# EAGLE board Anter (EAGLE 9.6.2)
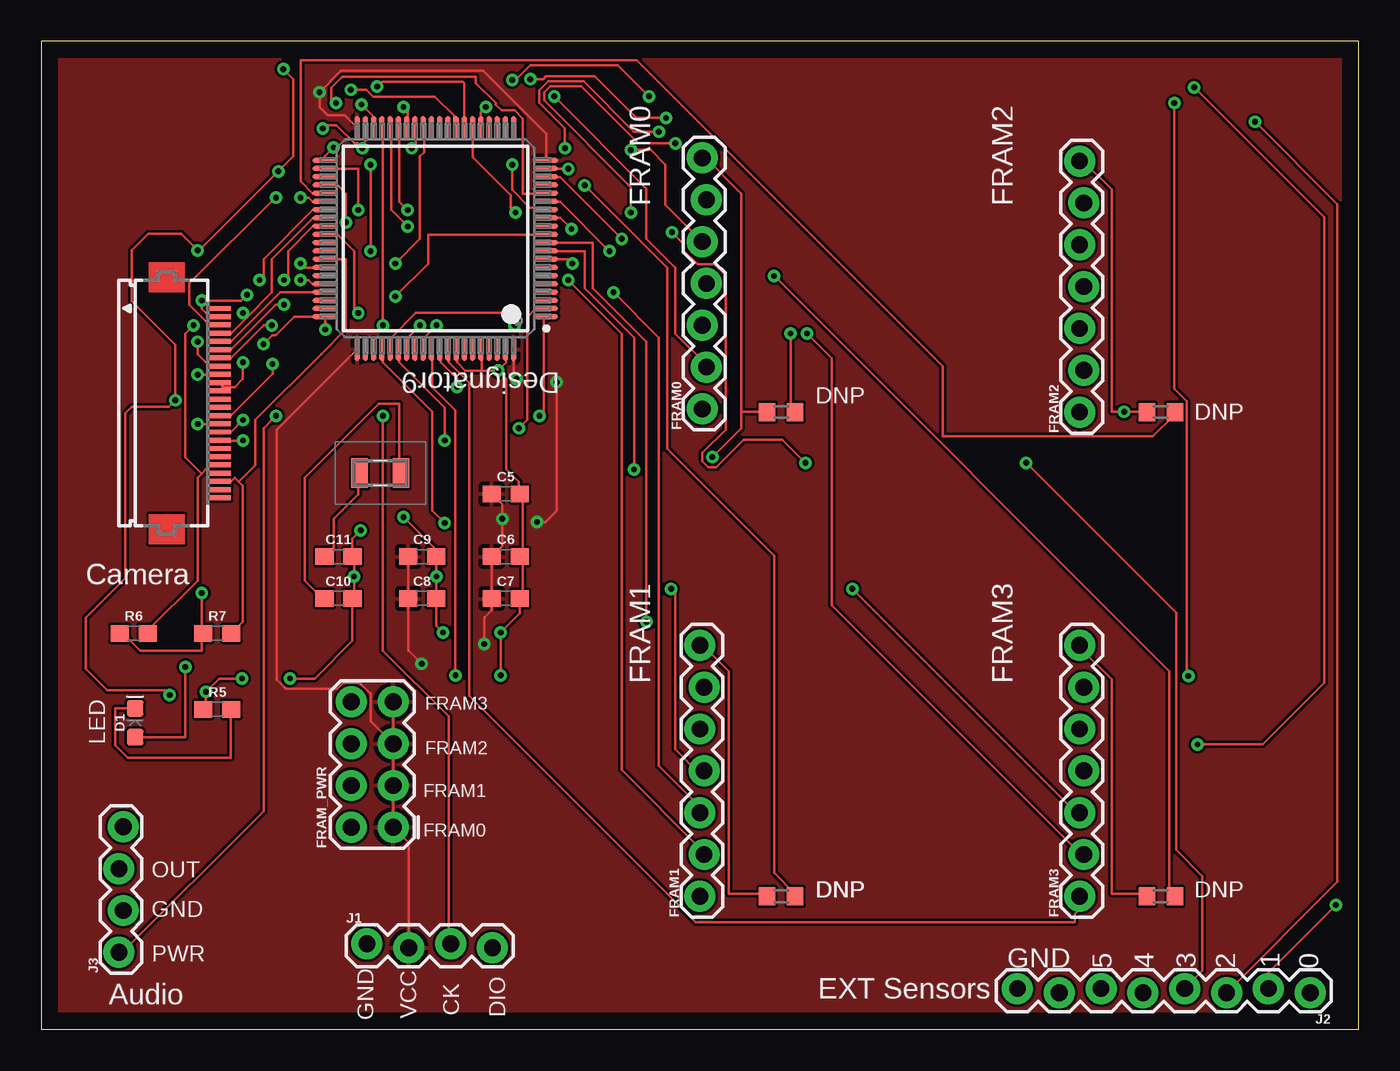
[diagram p0: board, top side]
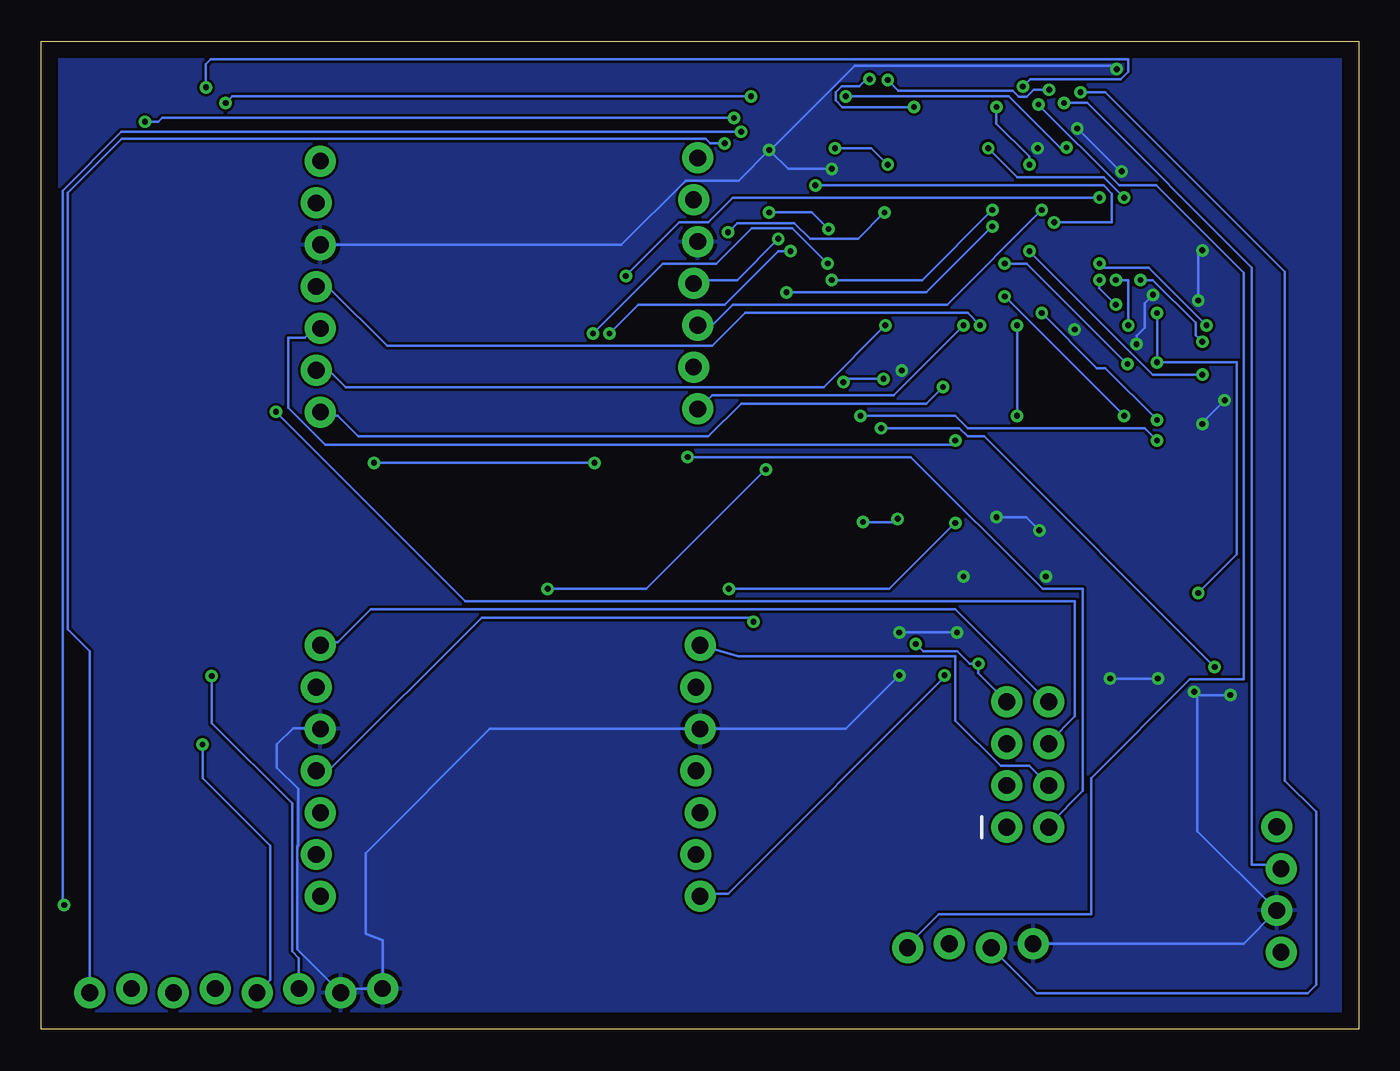
[diagram p1: board, bottom side, seen from below]

Size 80 x 60 mm. Coordinates in mm from the lower left corner, seen from the top.
Outline: 0,0 80,0 80,60 0,60 0,0
Copper layers (1*16): Top 0.035mm / dielectric 1.5mm / Bottom 0.035mm
Design rules "default": minimum track width 6mil, minimum drill 0.35mm, track to track 6mil, track to pad 6mil, pad to pad 6mil, via to via 6mil, smd to smd 6mil, copper to edge 40mil, drill to drill 6mil, minimum pad ring 10mil, minimum via ring 8mil, stop-mask expansion 4mil, vias tented up to drill 0mil, thermal gap 10mil

## Footprints (pad centres in the part's own frame; a part is rotated, then mirrored left to right if it is on the bottom)
0603 = smd 1.1 x 1: 1 -0.85,0; 2 0.85,0
LED-0603 = smd 1 x 1: A -0.877,0; C 0.877,0
1X07_LOCK = drill 1.016 pad 1.88: 1 0,0.127; 2 2.54,-0.127; 3 5.08,0.127; 4 7.62,-0.127; 5 10.16,0.127; 6 12.7,-0.127; 7 15.24,0.127
2X4 = drill 1.016 pad 1.88: 1 -3.81,-1.27; 2 -3.81,1.27; 3 -1.27,-1.27; 4 -1.27,1.27; 5 1.27,-1.27; 6 1.27,1.27; 7 3.81,-1.27; 8 3.81,1.27
1X04_LOCK = drill 1.016 pad 1.88: 1 0,0.127; 2 2.54,-0.127; 3 5.08,0.127; 4 7.62,-0.127
1X08_LOCK = drill 1.016 pad 1.88: 1 0,0.127; 2 2.54,-0.127; 3 5.08,0.127; 4 7.62,-0.127; 5 10.16,0.127; 6 12.7,-0.127; 7 15.24,0.127; 8 17.78,-0.127
R0603 = smd 1 x 1.1: 1 -0.85,0; 2 0.85,0
PN0080A_N = smd 1.45 x 0.3: 1 -6.725,4.75; 2 -6.725,4.25; 3 -6.725,3.75; 4 -6.725,3.25; 5 -6.725,2.75; 6 -6.725,2.25; 7 -6.725,1.75; 8 -6.725,1.25; 9 -6.725,0.75; 10 -6.725,0.25; 11 -6.725,-0.25; 12 -6.725,-0.75; 13 -6.725,-1.25; 14 -6.725,-1.75; 15 -6.725,-2.25; 16 -6.725,-2.75; 17 -6.725,-3.25; 18 -6.725,-3.75; 19 -6.725,-4.25; 20 -6.725,-4.75; 41 6.725,-4.75; 42 6.725,-4.25; 43 6.725,-3.75; 44 6.725,-3.25; 45 6.725,-2.75; 46 6.725,-2.25; 47 6.725,-1.75; 48 6.725,-1.25; 49 6.725,-0.75; 50 6.725,-0.25; 51 6.725,0.25; 52 6.725,0.75; 53 6.725,1.25; 54 6.725,1.75; 55 6.725,2.25; 56 6.725,2.75; 57 6.725,3.25; 58 6.725,3.75; 59 6.725,4.25; 60 6.725,4.75 | smd 0.3 x 1.45: 21 -4.75,-6.725; 22 -4.25,-6.725; 23 -3.75,-6.725; 24 -3.25,-6.725; 25 -2.75,-6.725; 26 -2.25,-6.725; 27 -1.75,-6.725; 28 -1.25,-6.725; 29 -0.75,-6.725; 30 -0.25,-6.725; 31 0.25,-6.725; 32 0.75,-6.725; 33 1.25,-6.725; 34 1.75,-6.725; 35 2.25,-6.725; 36 2.75,-6.725; 37 3.25,-6.725; 38 3.75,-6.725; 39 4.25,-6.725; 40 4.75,-6.725; 61 4.75,6.725; 62 4.25,6.725; 63 3.75,6.725; 64 3.25,6.725; 65 2.75,6.725; 66 2.25,6.725; 67 1.75,6.725; 68 1.25,6.725; 69 0.75,6.725; 70 0.25,6.725; 71 -0.25,6.725; 72 -0.75,6.725; 73 -1.25,6.725; 74 -1.75,6.725; 75 -2.25,6.725; 76 -2.75,6.725; 77 -3.25,6.725; 78 -3.75,6.725; 79 -4.25,6.725; 80 -4.75,6.725
FH12-24S-0.5SH = smd 0.3 x 1.3: 1 -5.75,3.25; 2 -5.25,3.25; 3 -4.75,3.25; 4 -4.25,3.25; 5 -3.75,3.25; 6 -3.25,3.25; 7 -2.75,3.25; 8 -2.25,3.25; 9 -1.75,3.25; 10 -1.25,3.25; 11 -0.75,3.25; 12 -0.25,3.25; 13 0.25,3.25; 14 0.75,3.25; 15 1.25,3.25; 16 1.75,3.25; 17 2.25,3.25; 18 2.75,3.25; 19 3.25,3.25; 20 3.75,3.25; 21 4.25,3.25; 22 4.75,3.25; 23 5.25,3.25; 24 5.75,3.25
FC135327680KAAG0 = smd 1 x 1.8: 1 -1.25,0; 2 1.25,0

## Placement (x,y rotation side)
C5  0.1uF  [0603]  28.21,32.51 0 top
C6  0.1uF  [0603]  28.21,28.7 0 top
C7  0.1uF  [0603]  28.21,26.16 0 top
C8  0.1uF  [0603]  23.13,26.16 0 top
C9  10uF  [0603]  23.13,28.7 0 top
C10  22pF  [0603]  18.05,26.16 0 top
C11  22pF  [0603]  18.05,28.7 0 top
D1  RED  [LED-0603]  5.7,18.62 90 top
FRAM0  [1X07_LOCK]  40.26,37.67 90 top
FRAM1  [1X07_LOCK]  40.12,8.08 90 top
FRAM2  [1X07_LOCK]  63.17,37.48 90 top
FRAM3  [1X07_LOCK]  63.17,8.08 90 top
FRAM_PWR  [2X4]  20.1,16.08 90 top
J1  [1X04_LOCK]  19.78,5.08 0 top
J2  [1X08_LOCK]  77.05,2.35 180 top
J3  [1X04_LOCK]  4.85,4.68 90 top
R0  [R0603]  44.93,37.48 0 top
R1  [R0603]  44.93,8.08 0 top
R2  [R0603]  67.98,37.48 0 top
R3  [R0603]  67.98,8.08 0 top
R5  470  [0603]  10.7,19.43 0 top
R6  4.7k  [0603]  5.62,24.05 0 top
R7  4.7k  [0603]  10.7,24.05 0 top
U0  MSP430FR5994PN  [PN0080A_N]  23.94,48.02 180 top
X1  CAM_24Pin  [FH12-24S-0.5SH]  7.62,38.02 270 top
Y1  FC-135R  [FC135327680KAAG0]  20.59,33.78 0 top

## Library data of the parts
C5-C8 = SparkFun-Capacitors; PROD_ID: CAP-08604
C9 = SparkFun-Capacitors; PROD_ID: CAP-11015
C10 C11 = SparkFun-Capacitors; PROD_ID: CAP-07876
D1 = SparkFun-LED; PROD_ID: DIO-00819
FRAM0 FRAM1-FRAM3 FRAM_PWR J2 = SparkFun-Connectors
J1 J3 = SparkFun-Connectors; PROD_ID: CONN-09696
R0 R1-R3 = rcl; SPICEPREFIX: R
R5 = SparkFun-Resistors; PROD_ID: RES-07869
R6 R7 = SparkFun-Resistors; PROD_ID: RES-07857
U0 = MSP430FR5994_MCU_80pin; MANUFACTURER: Texas Instruments; PARTNUMBER: MSP430FR5994IPNR; REFDES: RefDes; TYPE: TYPE
X1 = con-hirose; MPN: FH12-24S-0.5SH(55); OC_FARNELL: 1324552; OC_NEWARK: 34M6170
Y1 = FC-135R; ARROW_PART_NUMBER: FC-135R; DESCRIPTION: https://www.mouser.com/ds/2/137/1699449-465441.pdf; HEIGHT: mm; MANUFACTURER_NAME: SEIKO INSTRUMENTS; MANUFACTURER_PART_NUMBER: FC-135R

## Nets
CAM_D0: U0.32 X1.14
CAM_D1: U0.33 X1.3
CAM_D2: U0.34 X1.9
CAM_D3: U0.57 X1.5
CAM_FVLD: U0.56 X1.6
CAM_LVLD: U0.50 X1.16
CAM_MCLK: U0.47 X1.8
CAM_PCLK: U0.1 X1.17
CAM_PWR: R6.1 R7.1 U0.48 X1.4 X1.10 X1.11
CAM_SCL: R6.2 U0.54 X1.21
CAM_SDA: R7.2 U0.53 X1.22
CAM_TRIG: U0.49 X1.7
EXT0: J2.1 U0.13
EXT1: J2.2 U0.14
EXT2: J2.3 U0.25
EXT3: J2.4 U0.26
EXT4: J2.5 U0.27
EXT5: J2.6 U0.28
FRAM0_CS: FRAM0.1 U0.69
FRAM0_PWR: FRAM0.7 FRAM_PWR.2 R0.1
FRAM0_PWR_CTR: R0.2 U0.15
FRAM1_CS: FRAM1.1 U0.70
FRAM1_PWR: FRAM1.7 FRAM_PWR.4 R1.1
FRAM1_PWR_CTR: R1.2 U0.44
FRAM2_CS: FRAM2.1 U0.71
FRAM2_PWR: FRAM2.7 FRAM_PWR.6 R2.1
FRAM2_PWR_CTR: R2.2 U0.45
FRAM3_CS: FRAM3.1 U0.72
FRAM3_PWR: FRAM3.7 FRAM_PWR.8 R3.1
FRAM3_PWR_CTR: R3.2 U0.46
GND: C5.2 C6.2 C7.2 C8.2 C9.2 C10.2 C11.2 FRAM0.5 FRAM1.5 FRAM2.5 FRAM3.5 J1.1 J2.7 J2.8 J3.2 R5.1 U0.19 U0.39 U0.60 U0.73 U0.76 U0.79 X1.2 X1.15
LED: D1.A U0.2
MIC_OUT: J3.3 U0.16
MIC_PWR: J3.1 U0.11
N$1: C10.1 Y1.2
N$2: C11.1 Y1.1
N$11: D1.C R5.2
SBWTCK: J1.3 U0.37
SBWTDIO: J1.4 U0.38
UCA0_CLK: FRAM0.4 U0.18
UCA0_SIMO: FRAM0.2 U0.41
UCA0_SOMI: FRAM0.3 U0.42
UCA1_CLK: FRAM1.4 U0.64
UCA1_SIMO: FRAM1.2 U0.35
UCA1_SOMI: FRAM1.3 U0.36
UCA2_CLK: FRAM2.4 U0.67
UCA2_SIMO: FRAM2.2 U0.65
UCA2_SOMI: FRAM2.3 U0.66
UCA3_CLK: FRAM3.4 U0.10
UCA3_SIMO: FRAM3.2 U0.8
UCA3_SOMI: FRAM3.3 U0.9
VCC: C5.1 C6.1 C7.1 C8.1 C9.1 FRAM_PWR.1 FRAM_PWR.3 FRAM_PWR.5 FRAM_PWR.7 J1.2 U0.20 U0.40 U0.61 U0.80

## Tracks (layer width: path | path; a pad name or v marks a point on that pad's centre or on a via)
CAM_D0  (via drill 0.35)
  Top 0.152: v14.05,40.4 14.05,39.8 11.5,37.25 11,37.25 X1.14 | v21.5,46.5 23,48 23,53 23.25,53.25 23.25,54.5 U0.32
  Bottom 0.152: v14.05,40.4 20.15,46.5 v21.5,46.5
CAM_D1  (via drill 0.35)
  Top 0.152: v14.25,50.5 14.2,50.5 9,45.3 9,44 10.25,42.75 10.75,42.75 X1.3 | v22.5,53.5 22.75,53.75 22.75,54.5 U0.33
  Bottom 0.152: v14.25,50.5 15.5,51.75 20.75,51.75 v22.5,53.5
CAM_D2  (via drill 0.35)
  Top 0.152: v9.5,39.75 10.75,39.75 X1.9 | v20,52.5 v20,47.25 | v22,56 22.25,55.75 22.25,54.75 U0.34
  Bottom 0.152: v9.5,39.75 12.5,39.75 v20,47.25 | v20,52.5 20,53 22,55 v22,56
CAM_D3
  Top 0.152: X1.5 11,41.75 11.5,41.75 14.5,44.75 17,44.75 U0.57
CAM_FVLD  (via drill 0.35)
  Top 0.152: v14.75,44 14.25,44 11.5,41.25 11,41.25 X1.6 | v15.75,45.5 16.25,45.5 16.5,45.25 17,45.25 U0.56
  Bottom 0.152: v14.75,44 15.75,45 v15.75,45.5
CAM_LVLD  (via drill 0.35)
  Top 0.152: v12.25,37 11.5,36.25 11,36.25 X1.16 | v19.25,43.5 19,43.75 19,47.25 18,48.25 17.25,48.25 U0.50
  Bottom 0.152: v12.25,37 15.4,40.15 15.9,40.15 v19.25,43.5
CAM_MCLK  (via drill 0.35)
  Top 0.152: v9.5,41.75 9.5,41 10.25,40.25 10.75,40.25 X1.8 | v13.25,45.5 13.5,45.75 13.5,46.75 16.5,49.75 17,49.75 U0.47
  Bottom 0.152: v9.5,41.75 9.9,42.15 9.9,42.9 12.5,45.5 v13.25,45.5
CAM_PCLK  (via drill 0.35)
  Top 0.152: v12.25,35.75 11,35.75 X1.17 | v30.25,37.25 30.5,37.5 30.5,43.25 U0.1
  Bottom 0.152: v12.25,35.75 13,36.5 23.75,36.5 24.5,37.25 v30.25,37.25
CAM_PWR  (via drill 0.35)
  Top 0.152: R6.1 5,24 6,23 9.75,23 9.75,24 R7.1 9.75,24.25 v9.75,26.5 | 11,39 11,39.25 X1.10 | 11,39 11,38.75 X1.11 | 12.5,43.25 14,44.75 14,46.75 16.5,49.25 17,49.25 U0.48 | 12.5,43.25 11.5,42.25 11,42.25 X1.4 | 11,39 11.75,39 12.25,39.5 v12.25,40.5 | 12.5,43.25 v12.25,43.5
  Bottom 0.152: v12.25,43.5 v12.25,40.5 7.4,40.5 7.4,28.85 v9.75,26.5
CAM_SCL  (via drill 0.35)
  Top 0.152: 9.75,33.75 10,34 10.25,33.75 10.75,33.75 X1.21 | 9.75,33.75 9.5,33.5 9.5,27.25 6.5,24.25 R6.2 | v15.75,46.5 15.75,46.25 17,46.25 U0.54 | v9.25,42.75 8.75,42.25 8.75,34.75 9.75,33.75
  Bottom 0.152: v15.75,46.5 15.5,46.25 12.75,46.25 v9.25,42.75
CAM_SDA
  Top 0.152: R7.2 12.25,24.75 12.25,33 12,33.25 | 12,33.25 11.75,33.5 11.5,33.25 11,33.25 X1.22 | 12,33.25 13,34.25 13,37 17,41 18.5,42.5 18.5,46.75 17.25,46.75 U0.53
CAM_TRIG  (via drill 0.35)
  Top 0.152: v14,42.75 13.5,42.75 11.5,40.75 11,40.75 X1.7 | v14.75,45.5 15,45.75 15,47.25 16.5,48.75 17,48.75 U0.49
  Bottom 0.152: v14,42.75 14,45.5 v14.75,45.5
EXT0  (via drill 0.35)
  Top 0.152: U0.13 31.53,49.27 v32.2,48.6 | v35.8,49.6 35.8,51.14 30.54,56.4 30.54,56.9 30.9,57.26 32.8,57.26 36.26,53.8 v38.5,53.8
  Bottom 0.152: v32.2,48.6 33.2,49.6 v35.8,49.6 | v38.5,53.8 39.37,53.8 39.65,54.08 75.12,54.08 78.4,50.8 78.4,24.3 77.05,22.95 J2.1
EXT1  (via drill 0.35)
  Top 0.152: U0.14 30.54,49.89 29.68,49.89 28.6,50.97 v28.6,52.5 | v37.5,54.5 35.99,54.5 32.93,57.56 30.77,57.56 30.24,57.03 30.24,56.27 31.8,54.71 v31.8,53.5 | v78.61,7.55 74.51,3.45 J2.2
  Bottom 0.152: v28.6,52.5 29.6,53.5 v31.8,53.5 | v37.5,54.5 75.13,54.5 78.7,50.93 78.7,24.17 78.7,7.64 v78.61,7.55
EXT2  (via drill 0.35)
  Top 0.152: U0.25 26.69,55.69 v27,56 | v29.7,57.69 30.47,57.69 30.65,57.87 33.62,57.87 36.14,55.34 v37.94,55.34 | v73.7,55.11 78.7,50.11 78.7,8.95 J2.3
  Bottom 0.152: v27,56 31.36,56 31.76,56.4 31.76,56.9 31.4,57.26 30.34,57.26 29.91,57.69 v29.7,57.69 | v37.94,55.34 72.66,55.34 72.9,55.1 v73.69,55.1 v73.7,55.11
EXT3  (via drill 0.35)
  Top 0.152: v28.8,49.6 28.5,49.9 28.5,50.64 26.19,52.95 U0.26 | v38.3,48.4 38.97,47.73 38.97,47.35 39.85,46.46 40.87,46.46 41.55,45.77 41.55,36.41 40.14,35 40.14,34.5 40.5,34.14 41,34.14 42.66,35.8 45,35.8 v46.4,34.4 | v59.8,34.4 68.9,25.3 68.9,10.9 70.5,9.3 70.5,3.55 J2.4
  Bottom 0.152: v46.4,34.4 v59.8,34.4 | v28.8,49.6 30.41,47.99 33.31,47.99 34.27,48.95 37.74,48.95 v38.3,48.4
EXT4  (via drill 0.35)
  Top 0.152: U0.27 25.69,57.45 25.6,57.55 20.7,57.55 v20.4,57.24 | v70,57.2 77.9,49.3 77.9,21.04 74.17,17.3 v70.2,17.3
  Bottom 0.152: v20.4,57.24 19.95,57.69 14.45,57.69 14,58.14 14,58.91 69.7,58.91 70,58.61 v70,57.2 | v70.2,17.3 70.2,15.25 66.1,11.15 66.1,3.01 J2.5
EXT5  (via drill 0.35)
  Top 0.152: U0.28 25.07,54.87 25.07,55.48 23.91,56.64 20.15,56.64 19.73,57.05 v18.8,57.05 | v28.6,57.65 28.8,57.65 29.69,58.55 35.01,58.55 v36.9,56.65 | v68.8,56.25 68.8,38.88 69.56,38.12 69.56,21.54 v69.65,21.45
  Bottom 0.152: v18.8,57.05 19.73,57.05 20.15,56.64 20.65,56.64 21.02,57 27.95,57 v28.6,57.65 | v36.9,56.65 68.4,56.65 v68.8,56.25 | v69.65,21.45 69.65,18.6 64.77,13.72 64.77,4.74 64.35,4.32 J2.6
FRAM0_CS  (via drill 0.35)
  Top 0.152: v24,42.75 23.25,42 23.25,41.5 U0.69
  Bottom 0.152: v24,42.75 28.25,38.5 39.25,38.5 40,37.75 FRAM0.1
FRAM0_PWR  (via drill 0.35)
  Top 0.152: 42.5,37.5 44,37.5 R0.1 | 42.5,37.5 42.5,50.75 40.25,53 FRAM0.7 | v40.75,34.75 42.5,36.5 42.5,37.5
  Bottom 0.152: v40.75,34.75 27.2,34.75 19.2,26.75 16.75,26.75 16.75,14.5 18.75,12.5 FRAM_PWR.2
FRAM0_PWR_CTR  (via drill 0.35)
  Top 0.152: v45.5,42.25 45.5,37.75 45.75,37.5 R0.2 | v34.5,47.25 31.5,50.25 30.75,50.25 U0.15
  Bottom 0.152: v45.5,42.25 43.75,44 38.5,44 35.25,47.25 v34.5,47.25
FRAM1_CS  (via drill 0.35)
  Top 0.152: v25.15,21.5 25.15,37.6 23.75,39 23.75,41.25 U0.70
  Bottom 0.152: v25.15,21.5 25.15,21.4 38.3,8.25 39.75,8.25 FRAM1.1
FRAM1_PWR
  Top 0.152: R1.1 44,8.25 41.75,8.25 41.75,21.75 40,23.5 FRAM1.7
  Bottom 0.152: FRAM_PWR.4 19,15 20,16 21.75,16 24.5,18.75 24.5,22.65 37.67,22.65 FRAM1.7
FRAM1_PWR_CTR  (via drill 0.35)
  Top 0.152: v33,51.25 38,46.25 38,35.25 44.5,28.75 44.5,9.5 45.75,8.25 R1.2 | v18.5,49 18.5,50.75 18,51.25 17.25,51.25 U0.44
  Bottom 0.152: v33,51.25 15.5,51.25 15,50.75 15,49 v18.5,49
FRAM2_CS  (via drill 0.35)
  Top 0.152: v25.25,39 25.25,39.5 24.25,40.5 24.25,41.25 U0.71
  Bottom 0.152: v25.25,39 26.25,38 37.5,38 39.5,36 60.75,36 62,37.25 63,37.25 FRAM2.1
FRAM2_PWR  (via drill 0.35)
  Top 0.152: R2.1 67,37.5 v65.75,37.5 65,37.5 65,51 63.25,52.75 FRAM2.7
  Bottom 0.152: v65.75,37.5 54.25,26 17.25,26 17.25,19 18.75,17.5 FRAM_PWR.6
FRAM2_PWR_CTR
  Top 0.152: R2.2 68.75,37.25 67.5,36 54.75,36 54.75,40.25 36.15,58.85 15.75,58.85 15.75,51.5 16.5,50.75 17,50.75 U0.45
FRAM3_CS
  Top 0.152: U0.72 24.75,41.25 24.75,40.5 26,39.25 26,20.25 39.75,6.5 62.75,6.5 62.75,7 63,7.25 63,8 FRAM3.1
FRAM3_PWR
  Top 0.152: R3.1 67,8.25 65,8.25 65,21.25 63.25,23 63.25,23.25 FRAM3.7
  Bottom 0.152: FRAM_PWR.8 19,20 24.5,25.5 60,25.5 62,23.5 63,23.5 FRAM3.7
FRAM3_PWR_CTR  (via drill 0.35)
  Top 0.152: v44.5,45.75 68.5,21.75 68.5,8.5 68.75,8.25 R3.2 | v15.75,50.5 16.25,50.5 16.5,50.25 17,50.25 U0.46
  Bottom 0.152: v44.5,45.75 41.25,49 39.5,49 38,50.5 v15.75,50.5
GND  (via drill 0.35)
  Top 0.152: 26.75,40 25.75,40 25.25,40.5 25.25,41.25 U0.73 | 26.75,40 26.75,41.25 U0.76 | v27.75,40 28.25,40.5 28.25,41.25 U0.79 | 26.75,40 v27.75,40 | v27.75,40 28.25,39.5 28.25,34 29,33.25 29,32.75 C5.2 29.25,32.5 29.25,28.75 C6.2 29.25,28.5 29.25,26.25 C7.2 29.06,25.26 v27.9,24.1 v27.9,21.5 | R5.1 10,19.5 v10,20.5 10.8,21.3 v12.2,21.3 | v9.5,36.75 10.75,36.75 X1.15 | X1.2 10.75,43.25 10.25,43.25 9.75,43.75 v9.75,44.25 12.15,44.25 v12.5,44.6 | v17.25,42.5 17.25,43.25 U0.60 15.38,43.27 14.25,42.14 14.04,42.14 v13.5,41.6 | U0.39 19.75,54.5 19.75,54 19.5,53.75 v19.5,53.5 19.21,53.79 19.03,53.79 17.93,54.9 17.29,54.9 v17.1,54.7 | v32,52.25 30.75,52.25 U0.19 | v15.1,21.3 16.6,21.3 18.9,23.6 C10.2 19,26.25 v19,27.5 19,28.5 C11.2 18.9,29.8 v19.4,30.3 | v22,31.1 23.98,29.12 C9.2 24,28.5 v24,27.5 24,26.25 C8.2 23.98,24.52 v24.4,24.1 | FRAM0.5 37.9,50.06 37.9,52.5 37,53.4 v35.8,53.4 | v14.7,58.3 15.3,57.7 15.3,53 v14.4,52.1 9.6,47.3 v9.5,47.3 8.5,48.3 6.5,48.3 5.5,47.3 5.5,44.2 8.14,41.56 v8.14,38.2 7.74,37.8 5.5,37.8 5.1,37.4 5.1,27.4 2.7,25 2.7,21.9 4,20.6 7.5,20.6 v7.8,20.3
  Bottom 0.152: v13.5,41.6 13.5,42.1 13,42.6 13,44.1 v12.5,44.6 | v9.5,36.75 9.5,36.84 v8.14,38.2 | v9.5,47.3 9.75,47.05 v9.75,44.25 | J1.1 6.99,5.21 J3.2 9.8,12.04 9.8,20.3 | 9.8,20.3 v10,20.5 | v15.1,21.3 v12.2,21.3 | v19.4,30.3 20.2,31.1 v22,31.1 | v24.4,24.1 v27.9,24.1 | v27.9,21.5 31.16,18.24 FRAM1.5 52.76,18.24 60.3,10.7 60.3,5.8 59.27,5.41 J2.8 61.56,2.48 J2.7 61.82,2.22 64.47,4.87 64.47,11.1 64.4,11.17 64.4,14.6 65.7,15.9 65.7,17.3 64.7,18.3 63.1,18.3 FRAM3.5 | v17.1,54.7 14.49,52.1 v14.4,52.1 | 35.75,53.35 v35.8,53.4 37.66,51.54 40.87,51.54 44.77,47.64 FRAM2.5 | 35.75,53.35 34.65,52.25 v32,52.25 | v14.7,58.3 14.9,58.5 30.6,58.5 35.75,53.35 | v7.8,20.3 9.8,20.3
  pour Bottom: -2,62 -2,-2 82,-2 82,62
LED  (via drill 0.35)
  Top 0.152: v8.75,22 8.75,17.75 5.75,17.75 D1.A | v29,36.5 29.5,37 29.5,43.25 30,43.75 30.5,43.75 U0.2
  Bottom 0.152: v8.75,22 22.75,36 23.75,36 24.25,36.5 v29,36.5
MIC_OUT  (via drill 0.35)
  Top 0.152: U0.16 30.5,50.75 29.25,50.75 29.25,55.3 28.75,55.8 27.95,55.8 27.61,56.14 27.61,56.25 26.4,57.46 26.4,57.85 18.28,57.85 17.62,57.18 17.62,56.53 v17.9,56.25
  Bottom 0.152: v17.9,56.25 16.5,56.25 6.5,46.25 6.5,10 4.75,10 J3.3
MIC_PWR  (via drill 0.35)
  Top 0.152: v21.5,44.5 23.5,46.5 23.5,48.25 30.5,48.25 U0.11 | v14.25,37.25 13.5,36.5 13.5,13.25 4.75,4.5 J3.1
  Bottom 0.152: v14.25,37.25 v21.5,44.5
N$1
  Top 0.152: C10.1 17,26.25 16,27.25 16,33.5 20.5,38 21.75,38 21.75,34 Y1.2
N$2
  Top 0.152: C11.1 17.75,29.25 17.75,31 19.25,32.5 19.25,33.75 Y1.1
N$11
  Top 0.152: D1.C 5.5,19.5 4.5,19.5 4.5,17.25 5.25,16.5 11.5,16.5 11.5,19.25 R5.2
SBWTCK  (via drill 0.35)
  Top 0.152: v20.75,42.75 20.75,54.5 U0.37 | v20.75,37.25 20.75,23 24.75,19 24.75,5.25 J1.3
  Bottom 0.152: v20.75,37.25 v20.75,42.75
SBWTDIO  (via drill 0.35)
  Top 0.152: v19.45,56.15 20.25,55.35 20.25,54.75 U0.38
  Bottom 0.152: v19.45,56.15 14.55,51.25 12.3,51.25 7,45.95 7,21.25 10.25,21.25 16.25,15.25 16.25,7 25.5,7 27.5,5 J1.4
UCA0_CLK  (via drill 0.35)
  Top 0.152: v35.25,48 31.5,51.75 30.75,51.75 U0.18
  Bottom 0.152: v35.25,48 37.75,45.5 40.25,45.5 FRAM0.4
UCA0_SIMO  (via drill 0.35)
  Top 0.152: U0.41 17.21,53.02 v17.75,53.55 | v31.15,56.65 36.75,51.05 36.75,48 38.5,46.25 38.5,42.25 40.25,40.5 40.25,40.25 FRAM0.2
  Bottom 0.152: v17.75,53.55 18.15,53.55 21.25,56.65 v31.15,56.65
UCA0_SOMI  (via drill 0.35)
  Top 0.152: v19.25,49.75 19.25,52.25 17.25,52.25 U0.42
  Bottom 0.152: v19.25,49.75 25,44 38,44 39.25,42.75 FRAM0.3
UCA1_CLK  (via drill 0.35)
  Top 0.152: v24.5,30.75 23.75,31.5 23.75,37.5 20.75,40.5 20.75,41.25 U0.64 | v38.25,26.75 38.5,26.5 38.5,17 40,15.5 FRAM1.4
  Bottom 0.152: v24.5,30.75 28.5,26.75 v38.25,26.75
UCA1_SIMO  (via drill 0.35)
  Top 0.152: v22.25,49.75 21.75,50.25 21.75,54.5 U0.35 | v32,45.5 35.25,42.25 35.25,15.75 40,11 40,10.75 FRAM1.2
  Bottom 0.152: v22.25,49.75 26.5,45.5 v32,45.5
UCA1_SOMI  (via drill 0.35)
  Top 0.152: v22.25,48.75 21.25,49.75 21.25,54.5 U0.36 | v34.75,44.75 37.5,42 37.5,16 39.75,13.75 39.75,13.25 FRAM1.3
  Bottom 0.152: v22.25,48.75 26.25,44.75 v34.75,44.75
UCA2_CLK  (via drill 0.35)
  Top 0.152: v23,42.75 22.25,42 22.25,41.5 U0.67
  Bottom 0.152: v23,42.75 23.75,43.5 37.25,43.5 39.25,41.5 59,41.5 62.5,45 63.25,45 FRAM2.4
UCA2_SIMO  (via drill 0.35)
  Top 0.152: v28.75,42.75 28.75,43.5 22.75,43.5 21.25,42 21.25,41.5 U0.65
  Bottom 0.152: v28.75,42.75 32.5,39 61.5,39 62.5,40 63.25,40 FRAM2.2
UCA2_SOMI  (via drill 0.35)
  Top 0.152: v24.5,35.75 24.5,37.75 21.75,40.5 21.75,41.25 U0.66
  Bottom 0.152: v24.5,35.75 24.75,35.5 62.75,35.5 65,37.75 65,42 64,42 63.5,42.5 63.25,42.5 FRAM2.3
UCA3_CLK  (via drill 0.35)
  Top 0.152: v36.75,24.75 36.75,41.75 33.5,45 33.5,47.75 30.75,47.75 U0.10
  Bottom 0.152: v36.75,24.75 37,25 53.25,25 62.5,15.75 63.25,15.75 FRAM3.4
UCA3_SIMO  (via drill 0.35)
  Top 0.152: v32.25,46.5 32.25,46.75 30.75,46.75 U0.8 | v46.5,42.25 48,40.75 48,25.75 63.25,10.5 FRAM3.2
  Bottom 0.152: v32.25,46.5 34.4,48.65 36.85,48.65 39,46.5 42.25,46.5 v46.5,42.25
UCA3_SOMI  (via drill 0.35)
  Top 0.152: v36,34 36,42 33,45 33,47.25 30.75,47.25 U0.9 | v49.25,26.75 63,13 FRAM3.3
  Bottom 0.152: v36,34 43.25,26.75 v49.25,26.75
VCC  (via drill 0.35)
  Top 0.152: U0.80 28.69,39.67 v28.86,39.5 | v31.3,39.3 31.3,31.5 30.6,30.8 v30.1,30.8 | C5.1 28,31.87 v28,31 28,29.34 C6.1 C7.1 27.36,25.46 26.9,25 v26.9,23.4 | C9.1 C8.1 22.28,23.02 v23.1,22.2 | FRAM_PWR.7 FRAM_PWR.5 | FRAM_PWR.5 FRAM_PWR.3 FRAM_PWR.1 22.32,11.32 J1.2 | U0.40 18.43,55.5 17.4,55.5 16.9,56 v16.9,56.9 18.2,58.2 26.85,58.2 30.66,54.38 U0.20 | U0.61 14.3,36.41 14.3,21.24 14.85,20.69 17.98,20.69 18.35,21.06 19.31,21.06 20,20.37 20,18.72 FRAM_PWR.5
  Bottom 0.152: v28.86,39.5 31.1,39.5 v31.3,39.3 | v30.1,30.8 28.2,30.8 v28,31 | FRAM_PWR.7 23.1,21.62 v23.1,22.2 23.62,22.2 24.37,22.95 26.45,22.95 v26.9,23.4 | v16.9,56.9 15.4,56.9 4.5,46 4.5,15.1 2.6,13.2 2.6,2.7 3.1,2.2 19.57,2.2 J1.2
  pour Top: -1,61 -1,-1 81,-1 81,61

## Text on the board
tNames: FRAM0 | FRAM2 | DNP | DNP | Camera | FRAM1 | FRAM3 | FRAM3 | LED | FRAM2 | FRAM1 | FRAM0 | OUT | DNP | DNP | DNP | DNP | DNP | GND | GND | PWR | GND | VCC | 5 | 4 | 3 | 2 | 1 | 0 | CK | DIO | Audio | EXT Sensors